# Altium PCB pcb.PcbDoc
Units mm, origin at the board's own origin, x right, y up, seen from the top; angles counter-clockwise.
Board outline 29 x 31.75 mm, 2 copper layers (Top Layer, Bottom Layer); 5 components, 3 nets, 16 pads, 0 vias.
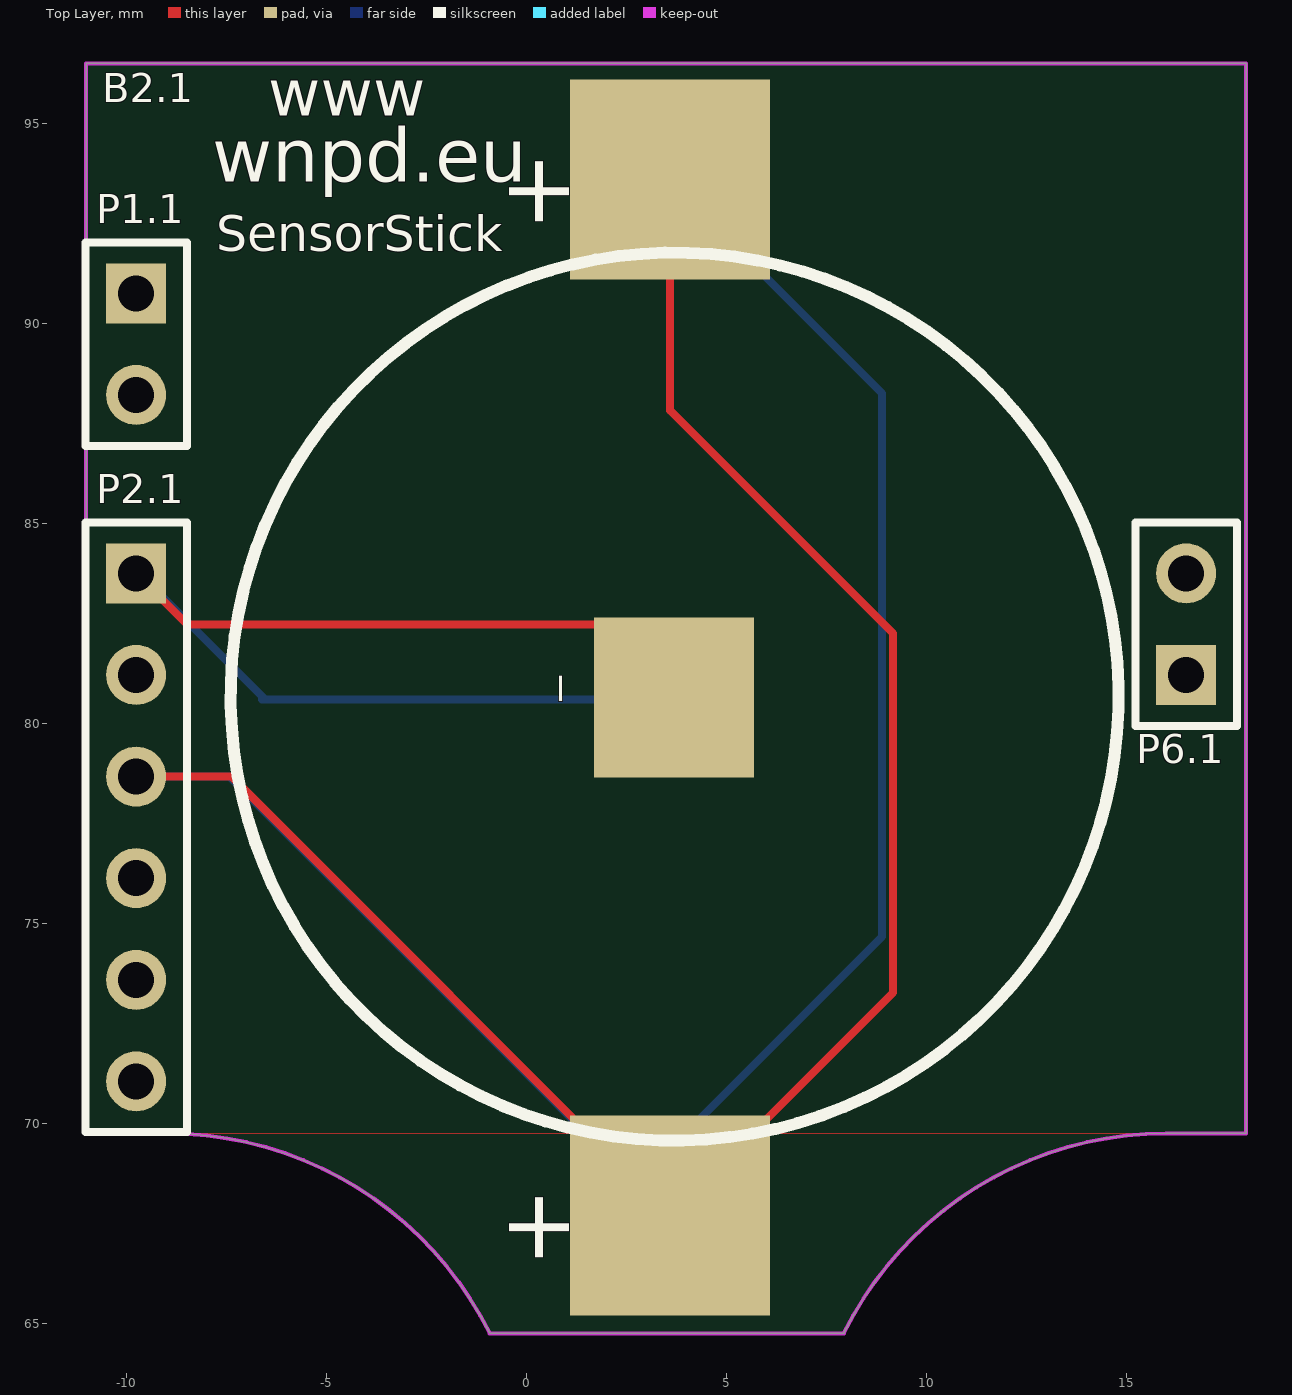
[diagram p0: Top Layer view]
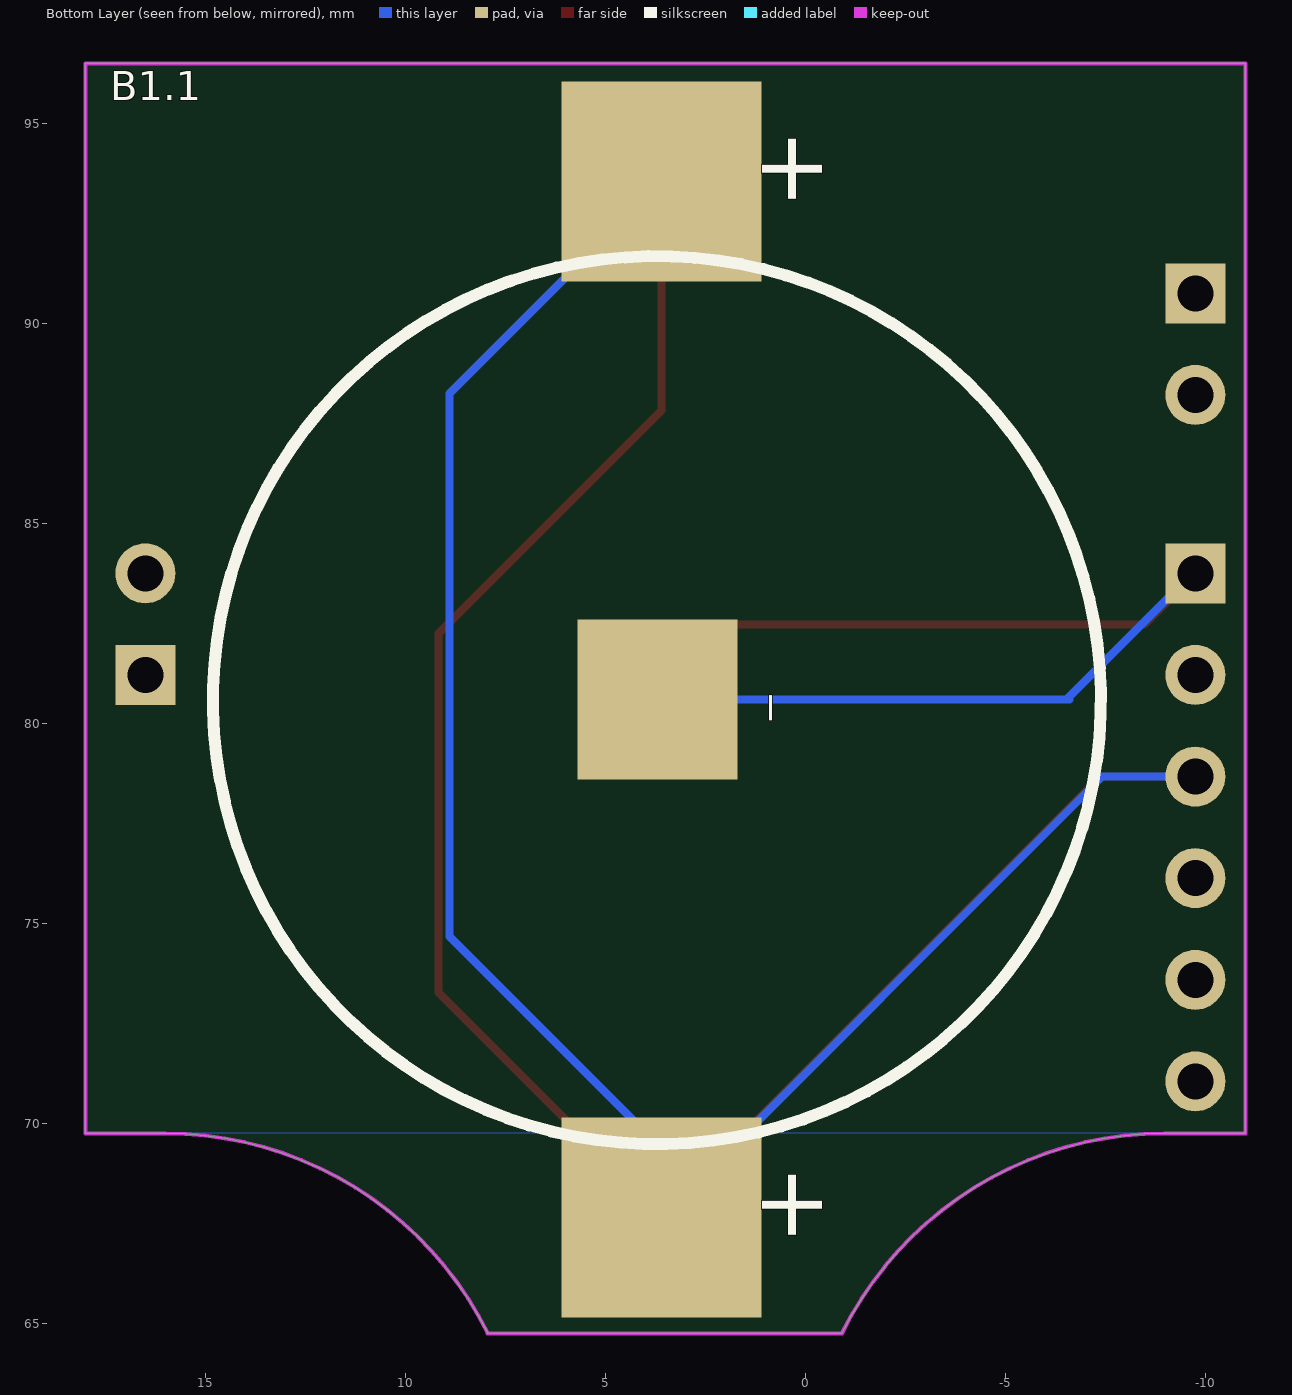
[diagram p1: Bottom Layer view, seen from below]

## Layer stack, top to bottom
Top Layer: signal copper 0.0356
Dielectric: dielectric 0.32, FR-4, Dk 4.8
Bottom Layer: signal copper 0.0356

## Board outline
-11,69.75 -11,96.5 18,96.5 18,69.75 16,69.75 ccw(c16,60.75) 7.94,64.755 7.95,64.75 -0.915,64.75 -0.915,64.755 ccw(c-8.975,60.75) -8.975,69.75

## Design rules (kind name [scope] priority, off if disabled: settings)
Clearance "Clearance via" [IsVia vs IsPad] p1: gap=0.5
Clearance Clearance-xPP-xTP-xTT [All] p2: gap=0.2
ComponentClearance [All] p1: gap=0.2 collisioncheckmode=3 verticalgap=0.2 showdistances=FALSE
HoleSize HoleSize-PTH [All] p1: absolutevalues=TRUE maxlimit=4 minlimit=0.25 maxpercent=80.000 minpercent=20.000
HoleToHoleClearance [All] p1: gap=0.15 allowstackedmicrovias=TRUE
MinimumAnnularRing "Minimum IAR <=0.45mm" [((ObjectKind = 'Pad') OR (ObjectKind = 'Via')) And (Layer = 'MultiLayer') And (HoleDiameter <= AsMM(0.45))] p1: minimumring=0.175 // minimum inner annular ring for pads <= 0.45mm finished hole size
MinimumSolderMaskSliver [All] p1: minsoldermaskwidth=0.1
PolygonConnect [All] p1: connectstyle=Relief reliefconductorwidth=0.254 reliefentries=4 polygonreliefangle="90 Angle" airgapwidth=0.254
RoomDefinition ArduinoDownload [InComponentClass('ArduinoDownload')] p1: confinementstyle=ConfineIn formatcopy=TRUE lockcomponents=FALSE outline 40.75,96.42 59,96.42 59,114.92 40.75,114.92
RoutingVias "RoutingVias <= 0.45mm" [All] p1: holewidth=0.25 width=0.7 viastyle="Through Hole" minholewidth=0.25 minwidth=0.6 maxholewidth=0.5 maxwidth=1 // finishet hole size <= 0.45mm
SilkToSilkClearance [All] p1: silktosilkclearance=0.2
SilkToSolderMaskClearance SilkscreenOverComponentPads [IsPad] p1: minsilkscreentomaskgap=0.2 clearancetoexposedcopper=TRUE
SolderMaskExpansion [All] p1: expansion=0.102
Width Width-xTW [All] p1: maxlimit=4 minlimit=0.2 preferedwidth=0.2
22 further rules are at their usual default settings.

## Classes and differential pairs
component class ArduinoDownload: P2.1

## Components (designator, comment, footprint, x,y, rotation, side; value= is the part's Value field where it differs from the comment)
B1.1 "Battery holder 2032" CR2032_pcb_SMT -3.5,86.25 r90 bottom (schematic designator B1)
B2.1 "Battery holder 2032" CR2032_pcb_SMT -3.5,75 r270 top (schematic designator B2)
P1.1 "9vIN" PH1x2_2.54 -9.75,90.75 r270 top (schematic designator P1)
P2.1 "Arduino Download interface" PH1x6_2.54 -9.75,83.75 r270 top (schematic designator P2)
P6.1 "Pin Header" PH1x2_2.54 16.5,81.21 r90 top (schematic designator P6)

## Footprints (in the part's own frame and the unit in brackets; to place one, negate y for a bottom-side part, rotate by r counter-clockwise, add the part's x,y. Pads: shape width x height; smd on the part's side, far side on the other; paste and mask are expansions set on the pad)
CR2032_pcb_SMT [mm]
  rect 5x5 smd: 1(-18.6,7.1) 1(7.3,7.1)
  rect 4x4 smd: 2(-5.65,7.2)
  silkscreen extent -16.77,-3.89 5.43,18.31
PH1x2_2.54 [mm] "Connector; Header; 2 Position"
  rect 1.5x1.5 hole 0.9: 1(0,0)
  round 1.5 hole 0.9: 2(2.54,0)
  silkscreen extent -1.27,-1.27 3.81,1.27, body extent -1.27,-1.27 3.81,1.27, height 8.38
PH1x6_2.54 [mm] "Connector; Header; 6 Position"
  rect 1.5x1.5 hole 0.9: 1(0,0)
  round 1.5 hole 0.9: 2(2.54,0) 3(5.08,0) 4(7.62,0) 5(10.16,0) 6(12.7,0)
  silkscreen extent -1.27,-1.27 13.97,1.27

## Part data
B1.1 B2.1: library part CR2032-PCB_SMT, "BATTERY"
P1.1 P6.1: library part PH1x2, "Con1x2"
P2.1: library part PH1x6, "Con1x6"

## Nets (pads, with @x,y where several pads share a name; then routed paths per layer and width w, separated by ;. In a path a pad name is that pad's centre, name@x,y a point inside that pad or via, vN(x,y) a via of type N, cw(c..) or ccw(c..) an arc to the next point about the centre after c; other vN are vias at no path point)
3V3: B1.1.1 B2.1.1 P2.1.3 | length 96.6
  Top Layer w0.2: P2.1.3 -7.37,78.67 3.6,67.7 9.175,73.275 9.175,82.25 3.6,87.825 B2.1.1@3.6,93.6
  Bottom Layer w0.2: P2.1.3 -7.42,78.67 3.6,67.65 3.6,69.375 8.9,74.675 8.9,88.25 B1.1.1@3.6,93.55
5V: P1.1.2
GND: B1.1.2 B2.1.2 P2.1.1 | length 29.6
  Top Layer w0.2: P2.1.1 -8.475,82.475 1.875,82.475 B2.1.2
  Bottom Layer w0.2: P2.1.1 -9.675,83.75 -6.525,80.6 ; -6.6,80.6 -6.525,80.6 ; B1.1.2 -6.525,80.6
pads on no net: P1.1.1 P2.1.2 P2.1.4 P2.1.5 P2.1.6 P6.1.1 P6.1.2

## Polygon pours and split planes (outlines as drawn)
GND on Bottom Layer "Bottom Layer-No Net" (solid, remove dead copper, shelved, pour order 2): -11,69.75 18,69.75 18,96.5 -11,96.5
GND on Top Layer "Bottom Layer-No Net" (solid, remove dead copper, shelved, pour order 4): -11,69.75 18,69.75 18,96.5 -11,96.5

## Keep-outs
Keep-Out Layer:
  lines w0.1: -0.915,64.75 7.95,64.75 ; -0.915,64.755 ccw(c-8.975,60.75) -8.975,69.75 -11,69.75 -11,96.5 18,96.5 18,69.75 16,69.75 ccw(c16,60.75) 7.94,64.755

## Silkscreen, mask and mechanical layers (free items; w line width, h text height)
Top Overlay:
  text "www" at -6.45,94.8 h2
  text "wnpd.eu" at -7.85,93.1 h2.3
  text "SensorStick" at -7.75,91.5 h1.52

## Text inside footprints (layer, text, board x,y; h text height)
B1.1: Bottom Overlay "-" at -0.3,79.95 h3 r270; Bottom Overlay "+" at -1,92.85 h3 r270; Bottom Overlay "+" at -1,66.95 h3 r270
B2.1: Top Overlay "+" at -1,94.3 h3 r270; Top Overlay "+" at -1,68.4 h3 r270; Top Overlay "-" at -0.3,81.3 h3 r270